# EAGLE board tpic-words (EAGLE 6.3)
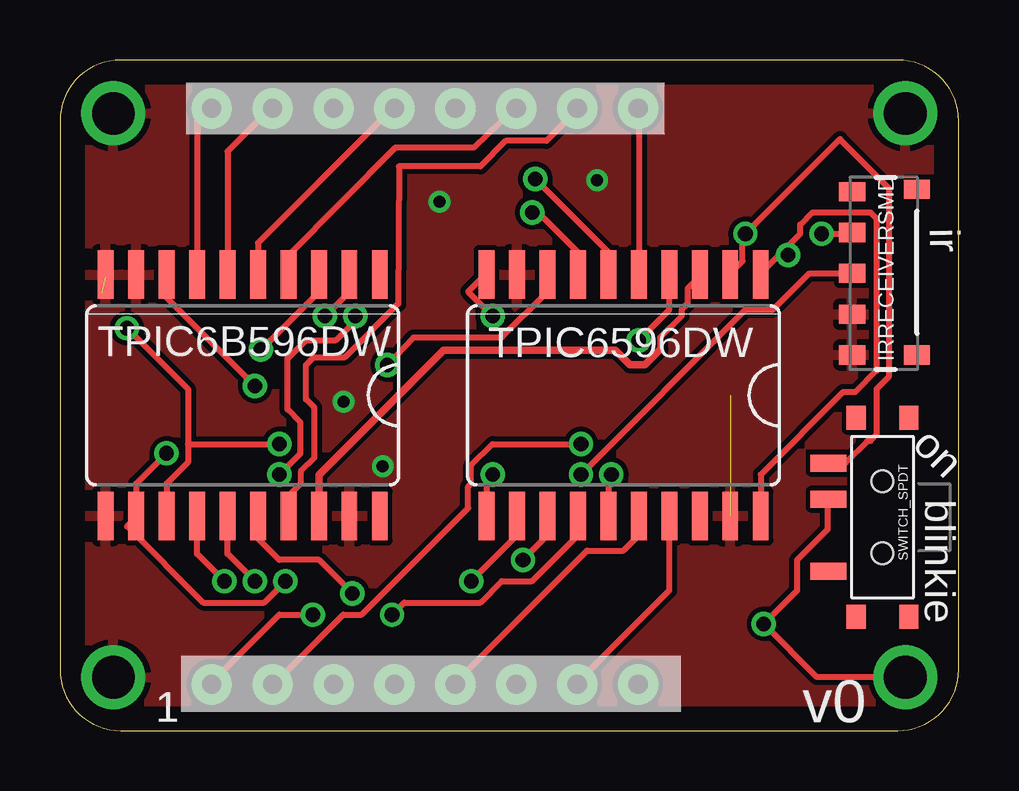
[diagram p0: board, top side]
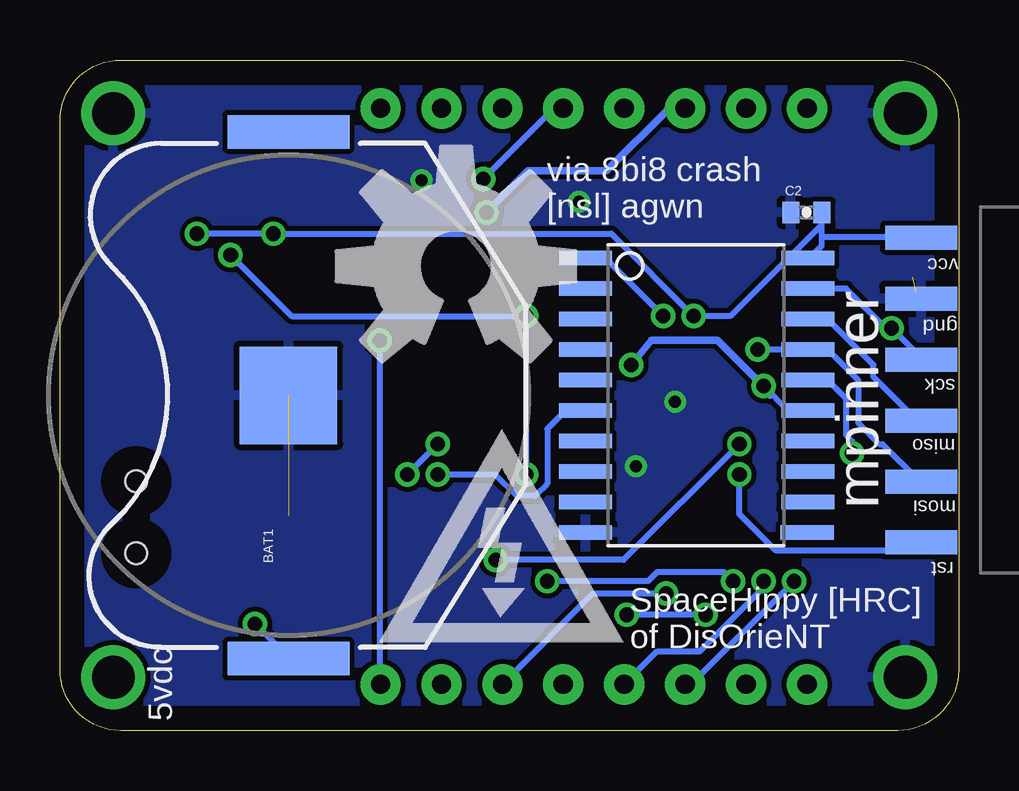
[diagram p1: board, bottom side, seen from below]

Size 37.46 x 27.94 mm. Coordinates in mm from the lower left corner, seen from the top.
Outline: 34.92,27.94 2.54,27.94 arc90 0,25.4 0,2.54 arc90 2.54,0 34.92,0 arc90 37.46,2.54 37.46,25.4 arc90 34.92,27.94
Copper layers (1*16): Top 0.035mm / dielectric 1.5mm / Bottom 0.035mm
Design rules "default *": minimum track width 10mil, minimum drill 24mil, track to track 8mil, track to pad 12mil, pad to pad 8mil, via to via 8mil, smd to smd 8mil, copper to edge 40mil, drill to drill 8mil, minimum pad ring 12mil, minimum via ring 8mil, stop-mask expansion 4mil, vias tented up to drill 25mil, thermal gap 10mil

## Footprints (pad centres in the part's own frame; a part is rotated, then mirrored left to right if it is on the bottom)
NSL_BATTICON_20MM_CLIPPED = smd 1.397 x 5.08: 1 -10.974,0; 3 10.974,0 | smd 4.064 x 4.064: 2 0,0
0402-CAP = smd 0.7 x 0.9: 1 -0.65,0; 2 0.65,0
SIMPLE_HOLE_SM = drill 1.778 pad 2.286: P$1 0,0
SO20W = smd 0.66 x 2.032: 1 -5.715,-5.029; 2 -4.445,-5.029; 3 -3.175,-5.029; 4 -1.905,-5.029; 5 -0.635,-5.029; 6 0.635,-5.029; 7 1.905,-5.029; 8 3.175,-5.029; 9 4.445,-5.029; 10 5.715,-5.029; 11 5.715,5.029; 12 4.445,5.029; 13 3.175,5.029; 14 1.905,5.029; 15 0.635,5.029; 16 -0.635,5.029; 17 -1.905,5.029; 18 -3.175,5.029; 19 -4.445,5.029; 20 -5.715,5.029
SEGMENT-HEADERS = drill 0.8 pad 1.676: 1 1.27,0.7; 2 3.81,0.7; 3 6.35,0.7; 4 8.89,0.7; 5 11.43,0.7; 6 13.97,0.7; 7 16.51,0.7; 8 19.05,0.7; 9 19.05,24.7; 10 16.51,24.7; 11 13.97,24.7; 12 11.43,24.7; 13 8.89,24.7; 14 6.35,24.7; 15 3.81,24.7; 16 1.27,24.7
AVR-6_SO20L$ = smd 0.61 x 2.21: 1 -5.715,-4.636; 2 -4.445,-4.636; 3 -3.175,-4.636; 4 -1.905,-4.636; 5 -0.635,-4.636; 6 0.635,-4.636; 7 1.905,-4.636; 8 3.175,-4.636; 9 4.445,-4.636; 10 5.715,-4.636; 11 5.715,4.61; 12 4.445,4.636; 13 3.175,4.636; 14 1.905,4.636; 15 0.635,4.636; 16 -0.635,4.636; 17 -1.905,4.636; 18 -3.175,4.636; 19 -4.445,4.636; 20 -5.715,4.636
KPS-1290 = smd 0.7 x 1.5: O -2.25,2.25; P 0.75,2.25; S 2.25,2.25 | smd 1 x 0.8: P$1 -4.15,1.1; P$2 -4.15,-1.1; P$3 4.15,-1.1; P$4 4.15,1.1 | hole 0.9: -1.5,0; 1.5,0
TSOP8523 = smd 0.8 x 1.1: 1 3.4,0; 2 1.7,0; 3 0,0; 4 -1.7,0; 5 -3.4,0; P$1 -3.4,-2.7; P$2 3.5,-2.7
1X06_EDGE = smd 1 x 3: 1 -6.35,-0.08; 2 -3.81,-0.08; 3 -1.27,-0.08; 4 1.27,-0.08; 5 3.81,-0.08; 6 6.35,-0.08

## Placement (x,y rotation side)
BAT1  [NSL_BATTICON_20MM_CLIPPED]  27.94,13.97 90 bottom
C2  0.1uF  [0402-CAP]  6.35,21.59 0 bottom
H1  SEW_HOLE-SMALL  [SIMPLE_HOLE_SM]  2.22,2.22 0 top
H2  SEW_HOLE-SMALL  [SIMPLE_HOLE_SM]  35.24,2.22 0 top
H3  SEW_HOLE-SMALL  [SIMPLE_HOLE_SM]  35.24,25.72 0 top
H4  SEW_HOLE-SMALL  [SIMPLE_HOLE_SM]  2.22,25.72 0 top
IC1  TPIC6B596DW  [SO20W]  7.62,13.97 180 top
IC2  TPIC6596DW  [SO20W]  23.49,13.97 180 top
LED1  [SEGMENT-HEADERS]  5.05,1.22 0 top
U$1  AVR-6_TINY2313-*S*  [AVR-6_SO20L$]  10.93,13.97 270 bottom
U$2  SWITCH_SPDT  [KPS-1290]  34.29,8.89 90 top
U$3  IRRECEIVERSMD  [TSOP8523]  33.02,19.05 90 top
U$4  1X06_PIN_HEADER  [1X06_EDGE]  1.64,14.19 90 bottom

## Library data of the parts
BAT1 U$1 U$4 = NSL
C2 = SparkFun-Capacitors; PROD_ID: CAP-00810
H1-H4 = LilyPad-Wearables
IC1 IC2 = tpic
LED1 = mattsEagleParts
U$2 = SparkFun-Electromechanical
U$3 = SparkFun-Sensors

## Nets
GND: BAT1.2 C2.1 H1.P$1 H3.P$1 H4.P$1 IC1.9 IC1.10 IC1.11 IC1.19 IC2.9 IC2.19 U$1.10 U$3.4 U$3.5 U$4.5
MISO: U$1.18 U$4.3
MOSI: IC1.3 U$1.17 U$4.2
N$2: BAT1.1 H2.P$1 U$2.P
N$10: IC1.7 LED1.16
N$11: IC1.6 LED1.15
N$12: IC1.5 LED1.13
N$13: IC1.4 LED1.11
N$14: IC1.17 LED1.10
N$15: IC1.16 LED1.6
N$16: IC1.15 LED1.4
N$17: IC1.14 LED1.3
N$18: IC1.18 IC2.3
N$21: U$1.6 U$3.3
N$22: IC1.12 IC2.12 U$1.16
N$23: IC1.8 IC2.8 U$1.15
PGND: IC2.1 IC2.10 IC2.11 IC2.20
R-PIN1: IC2.14 LED1.1
R-PIN2: IC2.15 LED1.2
R-PIN3: IC2.16 LED1.5
R-PIN4: IC2.17 LED1.7
R-PIN5: IC2.4 LED1.8
R-PIN6: IC2.5 LED1.9
R-PIN7: IC2.6 LED1.12
R-PIN8: IC2.7 LED1.14
RESET: U$1.1 U$4.1
SCK: IC1.13 IC2.13 U$1.19 U$4.4
VCC: C2.2 IC1.2 IC2.2 U$1.20 U$2.S U$3.2 U$4.6

## Tracks (layer width: path | path; a pad name or v marks a point on that pad's centre or on a via)
GND  (via drill 0.5 pad 0.41)  (2 unrouted)
  Top 0.305: IC1.10 1.9,18.89 1.9,18.88
  Bottom 0.305: U$4.5 1.56,18.07 1.77,18.27
  other vias: 13.46,11.01 15.83,22.03 22.39,22.93 11.82,13.7
  pour Bottom: 0,27.94 37.46,27.94 38.1,0 0,0
  pour Top: 0,27.94 37.53,28.04 38.03,-0.2 0,0
MISO
  Bottom 0.254: U$1.18 5.46,17.15 3.56,15.24 3.56,14.73 1.65,12.83 U$4.3
MOSI  (via drill 0.61)
  Top 0.254: IC1.3 10.79,18.29 v8.38,15.87
  Bottom 0.254: v8.38,15.87 U$1.17 5.46,15.87 4.19,14.6 4.19,12.83 3.3,11.94 3.17,11.94 1.65,10.41 U$4.2
N$2  (via drill 0.61)
  Top 0.254: U$2.P 32,9.53 32,8.38 30.73,7.11 30.73,5.84 v29.34,4.45 31.56,2.22 H2.P$1
  Bottom 0.254: v29.34,4.45 27.94,3.05 BAT1.1
N$10
  Top 0.254: IC1.7 5.71,25.4 6.22,25.91 LED1.16
N$11
  Top 0.254: IC1.6 6.99,24.13 8.76,25.91 LED1.15
N$12
  Top 0.254: IC1.5 8.26,20.32 13.84,25.91 LED1.13
N$13
  Top 0.254: IC1.4 9.53,19.81 13.97,24.29 17.24,24.29 18.92,25.91 LED1.11
N$14
  Top 0.254: IC1.17 9.53,9.78 10.03,10.29 10.03,10.79 10.61,11.37 10.61,13.44 10.25,13.8 10.25,15.24 10.58,15.56 11.88,15.56 14.1,17.78 14.13,23.51 17.53,23.51 18.58,24.57 20.28,24.57 21.56,25.85 21.46,25.91 LED1.10
N$15  (via drill 0.61)
  Top 0.254: IC1.16 8.26,8 9.14,7.11 10.79,7.11 v12.19,5.71
  Bottom 0.254: v12.19,5.71 15.24,5.71 18.92,2.03 LED1.6
N$16  (via drill 0.61)
  Top 0.254: IC1.15 6.99,7.37 v8.13,6.22
  Bottom 0.254: v8.13,6.22 8.13,5.97 10.79,3.3 12.57,3.3 13.84,2.03 LED1.4
N$17  (via drill 0.61)
  Top 0.254: IC1.14 5.71,7.37 v6.86,6.22
  Bottom 0.254: v6.86,6.22 11.05,2.03 11.3,2.03 LED1.3
N$18
  Top 0.254: 10.79,9.65 IC1.18 | 25.02,15.87 25.02,16.38 25.91,17.27 25.91,17.53 26.16,17.78 26.16,18.41 26.67,18.92 IC2.3
  Top 0.305: 10.79,9.65 10.79,10.66 15.99,15.85 23.16,15.85 23.77,15.24 24.38,15.24 25.02,15.87
N$21  (via drill 0.61)
  Top 0.254: U$3.3 31.24,19.05 29.72,17.53 28.57,17.53 v21.72,10.67
  Bottom 0.254: v21.72,10.67 19.3,10.67 18.41,9.78 17.65,9.78 17.14,10.29 17.14,12.57 16.38,13.33 U$1.6
N$22  (via drill 0.61)
  Top 0.254: v4.44,11.56 3.17,10.29 IC1.12 3.17,8.89 2.79,8.51 5.97,5.33 8.51,5.33 v9.4,6.22 | IC2.12 19.05,8.13 v17.14,6.22
  Bottom 0.254: v4.44,11.56 4.44,12.06 4.7,12.32 4.7,13.84 5.46,14.6 U$1.16 | v17.14,6.22 12.95,6.22 12.57,6.6 9.78,6.6 v9.4,6.22
N$23  (via drill 0.61)
  Top 0.254: IC1.8 4.44,18.03 v8.13,14.35 | IC2.8 20.32,18.29 18.41,16.38 14.73,16.38 v13.65,15.24
  Bottom 0.254: U$1.15 7.11,13.33 v8.13,14.35 7.87,13.97
  Bottom 0.305: 7.87,13.97 7.87,14.08 10.06,16.27 12.82,16.27 v13.65,15.24
PGND  (via drill 0.61)
  Top 0.254: IC2.11 17.78,10.41 v18.03,10.67 | v18.03,17.27 17.02,18.29 17.78,19.05 IC2.10 | IC2.20 29.21,10.67 32.64,14.1 33.15,14.1 34.04,14.99 34.04,21.34 33.78,21.59 31.37,21.59 30.86,21.08 30.86,20.7 30.16,20 | 30.16,20 29.21,19.05 IC2.1 | 30.16,20 v30.35,19.81
  Bottom 0.254: v18.03,10.67 v18.03,17.27 27.81,17.27 v30.35,19.81
R-PIN1  (via drill 0.61)
  Top 0.254: IC2.14 21.59,8.13 19.68,6.22 18.41,6.22 17.53,5.33 14.35,5.33 v13.84,4.83 | v10.54,4.83 9.14,4.83 6.35,2.03 LED1.1
  Bottom 0.254: v10.54,4.83 v13.84,4.83
R-PIN2  (via drill 0.61)
  Top 0.254: IC2.15 22.86,10.54 v22.99,10.67 | v21.72,11.94 18.03,11.94 17.14,11.05 17.14,10.29 17.02,10.16 17.02,9.27 12.57,4.83 11.81,4.83 8.89,1.91 LED1.2
  Bottom 0.254: v21.72,11.94 v22.99,10.67
R-PIN3
  Top 0.254: IC2.16 24.13,8.13 23.49,7.49 21.97,7.49 16.51,2.03 LED1.5
R-PIN4
  Top 0.254: IC2.17 25.4,5.84 21.59,2.03 LED1.7
R-PIN5  (via drill 0.61)
  Top 0.254: IC2.4 25.4,17.53 v24.13,16.26
  Bottom 0.254: v24.13,16.26 24.13,2.03 LED1.8
R-PIN6
  Top 0.254: IC2.5 24.13,25.91 LED1.9
R-PIN7  (via drill 0.61)
  Top 0.254: IC2.6 22.86,19.94 v19.81,22.99
  Bottom 0.254: v19.81,22.99 16.89,25.91 16.51,25.91 LED1.12
R-PIN8  (via drill 0.61)
  Top 0.254: IC2.7 21.59,19.94 19.81,21.72 v19.68,21.59
  Bottom 0.254: 11.3,25.91 LED1.14
  Bottom 0.305: 11.3,25.91 12.08,25.91 14.67,23.32 17.96,23.32 v19.68,21.59
RESET  (via drill 0.61)
  Top 0.254: v9.14,10.67 10.03,11.55 10.03,12.84 9.49,13.38 9.49,15.5 10.26,16.27 11.5,16.27 12.32,17.08 v12.32,17.27
  Bottom 0.254: U$1.1 14.73,19.69 v12.32,17.27 | v9.14,10.67 9.14,9.02 7.62,7.49 1.9,7.49 1.65,7.75 U$4.1
SCK  (via drill 0.61)
  Top 0.254: IC1.13 4.44,10.29 5.33,11.18 5.33,11.94 | 5.33,11.94 5.33,14.22 v2.79,16.76 | IC2.13 20.32,8.13 v19.3,7.11 | 5.33,11.94 v9.14,11.94
  Bottom 0.254: U$4.4 1.52,15.49 v2.79,16.76 3.05,16.76 4.7,18.41 U$1.19 | v19.3,7.11 13.97,7.11 v9.14,11.94
VCC  (via drill 0.61)
  Top 0.254: IC1.2 12.06,18.29 v11.05,17.27 | v31.75,20.7 33.02,20.7 U$3.2 | IC2.2 27.94,19.05 28.45,19.56 28.45,20.32 28.57,20.45 v28.57,20.7 32.51,24.64 34.54,22.61 34.54,14.73 34.04,14.22 34.04,12.32 33.78,12.06 33.66,12.06 32.77,11.18 32.13,11.18 U$2.S
  Bottom 0.254: 5.71,20.57 5.71,20.19 6.22,19.69 U$1.20 | 5.71,20.57 5.71,21.08 | 5.71,21.08 5.71,21.59 C2.2 | 5.71,21.08 9.53,17.27 v11.05,17.27 14.48,20.7 v28.57,20.7 v31.75,20.7 | 5.71,20.57 1.65,20.57 U$4.6

## Text on the board
tPlace: ir | on | blinkie | 1 | v0
bPlace: via 8bi8 crash / [nsl] agwn | vcc | gnd | sck | miso | mosi | mpinner | rst | SpaceHippy [HRC] / of DisOrieNT | 5vdc